# EAGLE board PCB_Iteration2.1FINAL (EAGLE 8.3.2)
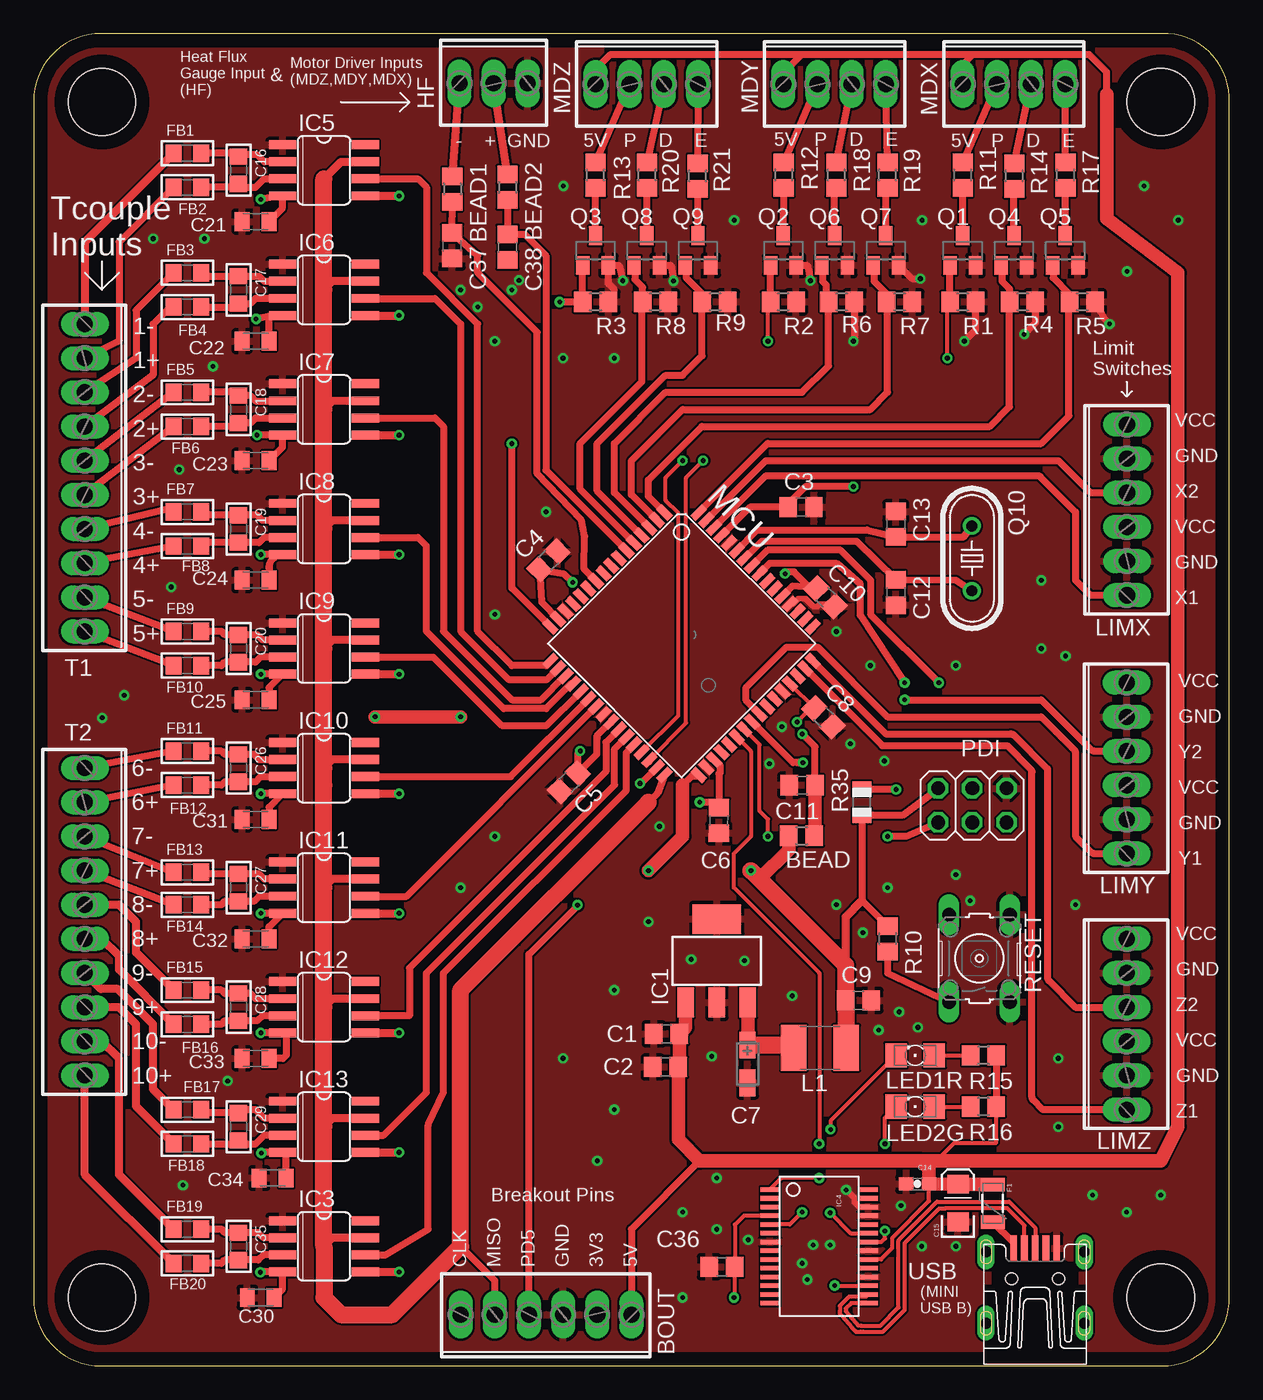
[diagram p0: board, top side]
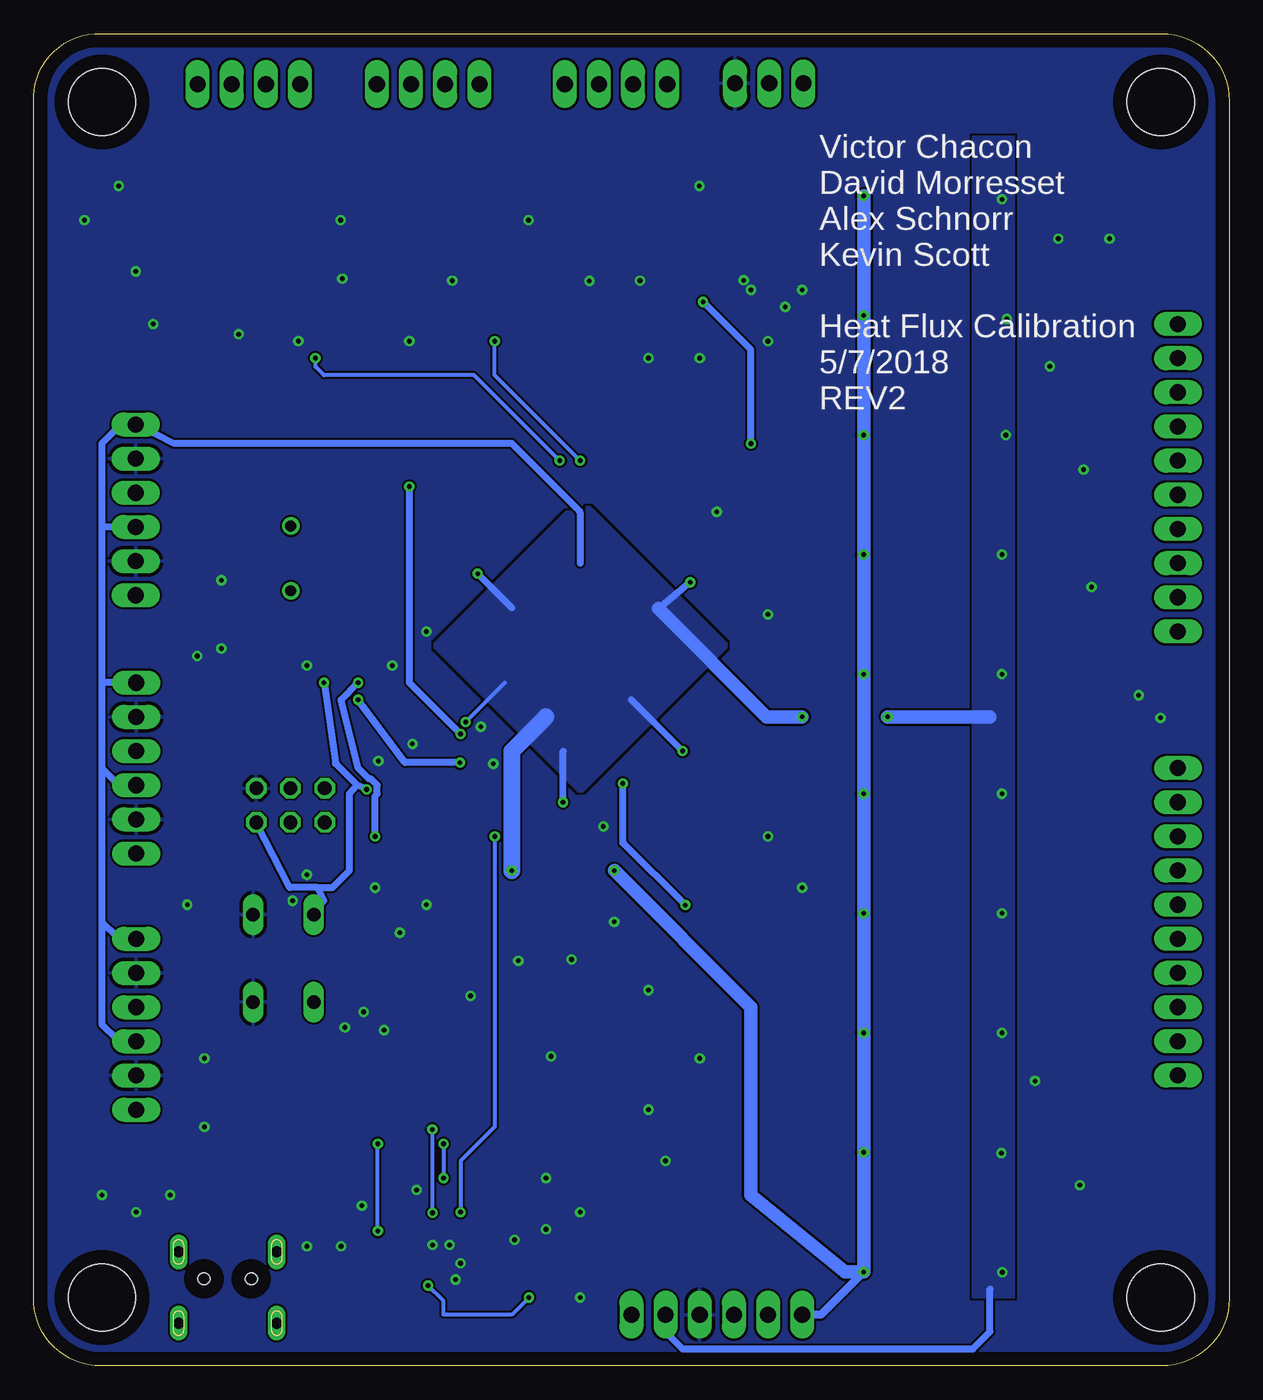
[diagram p1: board, bottom side, seen from below]

Size 88.9 x 99.06 mm. Coordinates in mm from the lower left corner, seen from the top.
Outline: 5,0 83.9,0 arc86 88.9,4.67 88.9,94.39 arc90 83.9,99.06 5,99.06 arc90 0,94.06 0,5 arc90 5,0
Copper layers (1*16): Top 0.035mm / dielectric 1.5mm / Bottom 0.035mm
Design rules "default": minimum track width 6mil, minimum drill 0.35mm, track to track 6mil, track to pad 6mil, pad to pad 6mil, via to via 6mil, smd to smd 6mil, copper to edge 40mil, drill to drill 6mil, minimum pad ring 10mil, minimum via ring 8mil, stop-mask expansion 4mil, vias tented up to drill 0mil, thermal gap 10mil
Net classes: 1 power: width 0.254 mm
Holes 5 mm at 5.08,93.98 5.08,5.08 83.82,5.08 83.82,93.98

## Footprints (pad centres in the part's own frame; a part is rotated, then mirrored left to right if it is on the bottom)
R0805 = smd 1.3 x 1.5: 1 -0.95,0; 2 0.95,0
6POL254 = drill 1.2 pad 1.778 long: 1 -6.35,0; 2 -3.81,0; 3 -1.27,0; 4 1.27,0; 5 3.81,0; 6 6.35,0
C0805 = smd 1.3 x 1.5: 1 -0.95,0; 2 0.95,0
CT3216 = smd 2 x 1.2: + -1.4,0; - 1.4,0
0603-CAP = smd 1.1 x 1: 1 -0.85,0; 2 0.85,0
EIA3216 = smd 1.4 x 1.6: A 1.4,0; C -1.4,0
_0805 = smd 1.2 x 1.3: 1 -1.016,0; 2 1.016,0
C0805K = smd 1.1 x 1.4: 1 -1,0; 2 1,0
PTC-1206 = smd 1 x 1.8: 1 -1.4,0; 2 1.4,0
3POL254 = drill 1.2 long: 1 -2.54,0; 2 0,0; 3 2.54,0
SOT223 = smd 1.219 x 2.235: 1 -2.311,-3.099; 2 0,-3.099; 3 2.311,-3.099 | smd 3.6 x 2.2: 4 0,3.099
SO08 = smd 0.66 x 2.032: 1 -1.905,-3.073; 2 -0.635,-3.073; 3 0.635,-3.073; 4 1.905,-3.073; 5 1.905,3.073; 6 0.635,3.073; 7 -0.635,3.073; 8 -1.905,3.073
SSOP28DB = smd 0.348 x 1.397: 1 -4.225,-3.656; 2 -3.575,-3.656; 3 -2.925,-3.656; 4 -2.275,-3.656; 5 -1.625,-3.656; 6 -0.975,-3.656; 7 -0.325,-3.656; 8 0.325,-3.656; 9 0.975,-3.656; 10 1.625,-3.656; 11 2.275,-3.656; 12 2.925,-3.656; 13 3.575,-3.656; 14 4.225,-3.656; 15 4.225,3.656; 16 3.575,3.656; 17 2.925,3.656; 18 2.275,3.656; 19 1.625,3.656; 20 0.975,3.656; 21 0.325,3.656; 22 -0.325,3.656; 23 -0.975,3.656; 24 -1.625,3.656; 25 -2.275,3.656; 26 -2.925,3.656; 27 -3.575,3.656; 28 -4.225,3.656
L1812 = smd 1.9 x 3.4: 1 -1.95,0; 2 1.95,0
LED_1206 = smd 1.6 x 1.803: A -1.422,0; C 1.422,0
TQFP-64A-64 = smd 1.194 x 0.559: 1 -7.8,6; 2 -7.8,5.2; 3 -7.8,4.4; 4 -7.8,3.6; 5 -7.8,2.8; 6 -7.8,2; 7 -7.8,1.2; 8 -7.8,0.4; 9 -7.8,-0.4; 10 -7.8,-1.2; 11 -7.8,-2; 12 -7.8,-2.8; 13 -7.8,-3.6; 14 -7.8,-4.4; 15 -7.8,-5.2; 16 -7.8,-6; 33 7.8,-6; 34 7.8,-5.2; 35 7.8,-4.4; 36 7.8,-3.6; 37 7.8,-2.8; 38 7.8,-2; 39 7.8,-1.2; 40 7.8,-0.4; 41 7.8,0.4; 42 7.8,1.2; 43 7.8,2; 44 7.8,2.8; 45 7.8,3.6; 46 7.8,4.4; 47 7.8,5.2; 48 7.8,6 | smd 0.559 x 1.194: 17 -6,-7.8; 18 -5.2,-7.8; 19 -4.4,-7.8; 20 -3.6,-7.8; 21 -2.8,-7.8; 22 -2,-7.8; 23 -1.2,-7.8; 24 -0.4,-7.8; 25 0.4,-7.8; 26 1.2,-7.8; 27 2,-7.8; 28 2.8,-7.8; 29 3.6,-7.8; 30 4.4,-7.8; 31 5.2,-7.8; 32 6,-7.8; 49 6,7.8; 50 5.2,7.8; 51 4.4,7.8; 52 3.6,7.8; 53 2.8,7.8; 54 2,7.8; 55 1.2,7.8; 56 0.4,7.8; 57 -0.4,7.8; 58 -1.2,7.8; 59 -2,7.8; 60 -2.8,7.8; 61 -3.6,7.8; 62 -4.4,7.8; 63 -5.2,7.8; 64 -6,7.8
4POL254 = drill 1.2 long: 1 -3.81,0; 2 -1.27,0; 3 1.27,0; 4 3.81,0
2X03 = drill 1.016 octagon: 1 -2.54,-1.27; 2 -2.54,1.27; 3 0,-1.27; 4 0,1.27; 5 2.54,-1.27; 6 2.54,1.27
SOT23 = smd 1 x 1.4: 1 -0.95,-1.1; 2 0.95,-1.1; 3 0,1.1
HC49/S = drill 0.813: 1 -2.413,0; 2 2.413,0
R0805' = smd 1.1 x 1.4: 1 -1,0; 2 1,0
B3F-10XX = drill 1.016 long: 1 -3.251,2.261; 2 3.251,2.261; 3 -3.251,-2.261; 4 3.251,-2.261
10POL254 = drill 1.2 long: 1 -11.43,0; 2 -8.89,0; 3 -6.35,0; 4 -3.81,0; 5 -1.27,0; 6 1.27,0; 7 3.81,0; 8 6.35,0; 9 8.89,0; 10 11.43,0
UX60-MB-5S8 = smd 2 x 0.5: 1 8.65,1.6; 2 8.65,0.8; 3 8.65,0; 4 8.65,-0.8; 5 8.65,-1.6 | drill 0.8 long: M1 3.1,-3.65; M2 3.1,3.65; M3 8.4,3.65; M4 8.4,-3.65 | hole 0.9: 6.4,-1.75; 6.4,1.75

## Placement (x,y rotation side)
BEAD  220 Ohm  [R0805]  57.1,39.42 0 top
BEAD1  220 Ohm  [R0805]  31.14,87.5 270 top
BEAD2  220 Ohm  [R0805]  35.24,87.63 270 top
BOUT  [6POL254]  38.1,3.81 180 top
C1  1uF  [C0805]  47.07,24.69 180 top
C2  10uF  [C0805]  46.99,22.23 180 top
C3  100nF  [C0805]  57.07,63.86 0 top
C4  100nF  [C0805]  38.28,59.89 45 top
C5  100nF  [C0805]  39.8,43.41 225 top
C6  100nF  [C0805]  50.95,40.56 269.8 top
C7  3.3uF  [CT3216]  53.09,22.45 270 top
C8  10nF  [C0805]  58.72,48.23 315 top
C9  10nF  [C0805]  61.34,27.18 0 top
C10  10nF  [C0805]  58.88,57.15 314.9 top
C11  10uF  [C0805]  57.15,43.18 180 top
C12  10pF  [C0805]  64.11,57.51 270 top
C13  10pF  [C0805]  64.11,62.59 90 top
C14  0.1uF  [0603-CAP]  65.74,13.54 180 top
C15  10uF  [EIA3216]  68.73,12.12 90 top
C16  0.01µF  [_0805]  15.24,88.9 270 top
C17  0.01µF  [_0805]  15.24,80.01 270 top
C18  0.01µF  [_0805]  15.24,71.12 270 top
C19  0.01µF  [_0805]  15.24,62.23 270 top
C20  0.01µF  [_0805]  15.24,53.34 270 top
C21  0.1 uF  [C0805K]  16.51,85.09 180 top
C22  0.1 uF  [C0805K]  16.51,76.2 180 top
C23  0.1 uF  [C0805K]  16.51,67.31 180 top
C24  0.1 uF  [C0805K]  16.51,58.42 180 top
C25  0.1 uF  [C0805K]  16.51,49.53 180 top
C26  0.01µF  [_0805]  15.24,44.45 270 top
C27  0.01µF  [_0805]  15.24,35.56 270 top
C28  0.01µF  [_0805]  15.24,26.67 270 top
C29  0.01µF  [_0805]  15.24,17.78 270 top
C30  0.1 uF  [C0805K]  16.89,5.08 180 top
C31  0.1 uF  [C0805K]  16.51,40.64 180 top
C32  0.1 uF  [C0805K]  16.51,31.75 180 top
C33  0.1 uF  [C0805K]  16.51,22.86 180 top
C34  0.1 uF  [C0805K]  17.78,13.97 180 top
C35  0.01µF  [_0805]  15.24,8.89 270 top
C36  0.1uF  [C0805]  51.18,7.37 180 top
C37  10nF  [C0805]  31.11,83.29 270 top
C38  10nF  [C0805]  35.24,83.19 270 top
F1  500mA  [PTC-1206]  71.32,12.09 90 top
FB1  Ferrite  [_0805]  11.43,90.17 0 top
FB2  Ferrite  [_0805]  11.43,87.63 0 top
FB3  Ferrite  [_0805]  11.43,81.28 0 top
FB4  Ferrite  [_0805]  11.43,78.74 0 top
FB5  Ferrite  [_0805]  11.43,72.39 0 top
FB6  Ferrite  [_0805]  11.43,69.85 0 top
FB7  Ferrite  [_0805]  11.43,63.5 0 top
FB8  Ferrite  [_0805]  11.43,60.96 0 top
FB9  Ferrite  [_0805]  11.43,54.61 0 top
FB10  Ferrite  [_0805]  11.43,52.07 0 top
FB11  Ferrite  [_0805]  11.43,45.72 0 top
FB12  Ferrite  [_0805]  11.43,43.18 0 top
FB13  Ferrite  [_0805]  11.43,36.7 0 top
FB14  Ferrite  [_0805]  11.43,34.29 0 top
FB15  Ferrite  [_0805]  11.43,27.94 0 top
FB16  Ferrite  [_0805]  11.43,25.4 0 top
FB17  Ferrite  [_0805]  11.43,19.05 0 top
FB18  Ferrite  [_0805]  11.43,16.51 0 top
FB19  Ferrite  [_0805]  11.43,10.16 0 top
FB20  Ferrite  [_0805]  11.43,7.62 0 top
HF  [3POL254]  34.2,95.36 0 top
IC1  [SOT223]  50.8,30.12 0 top
IC3  MAX31855  [SO08]  21.59,8.89 270 top
IC4  FT232R  [SSOP28DB]  58.42,8.89 270 top
IC5  MAX31855  [SO08]  21.59,88.9 270 top
IC6  MAX31855  [SO08]  21.59,80.01 270 top
IC7  MAX31855  [SO08]  21.59,71.12 270 top
IC8  MAX31855  [SO08]  21.59,62.23 270 top
IC9  MAX31855  [SO08]  21.59,53.34 270 top
IC10  MAX31855  [SO08]  21.59,44.45 270 top
IC11  MAX31855  [SO08]  21.59,35.56 270 top
IC12  MAX31855  [SO08]  21.59,26.67 270 top
IC13  MAX31855  [SO08]  21.59,17.78 270 top
L1  10uH  [L1812]  58.47,23.65 0 top
LED1R  [LED_1206]  65.56,23.09 180 top
LED2G  [LED_1206]  65.56,19.28 180 top
LIMX  [6POL254]  81.31,63.65 90 top
LIMY  [6POL254]  81.28,44.45 90 top
LIMZ  [6POL254]  81.28,25.4 90 top
MCU  ATXMEGA256A3-AU  [TQFP-64A-64]  48.18,53.7 315 top
MDX  [4POL254]  72.9,95.31 0 top
MDY  [4POL254]  59.56,95.31 0 top
MDZ  [4POL254]  45.59,95.31 0 top
PDI  [2X03]  69.8,41.68 0 top
Q1  BSS123  [SOT23]  69.09,82.93 0 top
Q2  BSS123  [SOT23]  55.75,82.93 0 top
Q3  BSS123  [SOT23]  41.78,82.93 0 top
Q4  BSS123  [SOT23]  72.9,82.93 0 top
Q5  BSS123  [SOT23]  76.71,82.93 0 top
Q6  BSS123  [SOT23]  59.56,82.93 0 top
Q7  BSS123  [SOT23]  63.37,82.93 0 top
Q8  BSS123  [SOT23]  45.59,82.93 0 top
Q9  BSS123  [SOT23]  49.4,82.93 0 top
Q10  12MHz  [HC49/S]  69.77,60.05 270 top
R1  10kOhm  [R0805]  69.09,79.12 0 top
R2  10kOhm  [R0805]  55.75,79.12 0 top
R3  10kOhm  [R0805]  41.78,79.12 0 top
R4  10kOhm  [R0805]  73.53,79.12 0 top
R5  10kOhm  [R0805]  77.98,79.12 0 top
R6  10kOhm  [R0805]  60.07,79.12 0 top
R7  10kOhm  [R0805]  64.39,79.12 0 top
R8  10kOhm  [R0805]  46.23,79.12 0 top
R9  10kOhm  [R0805]  50.67,79.12 0 top
R10  10kOhm  [R0805]  63.5,31.75 270 top
R11  220Ohm  [R0805]  69.09,88.54 90 top
R12  220Ohm  [R0805]  55.78,88.54 90 top
R13  220Ohm  [R0805]  41.78,88.54 90 top
R14  220Ohm  [R0805]  72.92,88.47 90 top
R15  1 kOhm  [R0805]  70.64,23.09 180 top
R16  1 kOhm  [R0805]  70.64,19.28 180 top
R17  220Ohm  [R0805]  76.73,88.54 90 top
R18  220Ohm  [R0805]  59.69,88.54 90 top
R19  220Ohm  [R0805]  63.5,88.54 90 top
R20  220Ohm  [R0805]  45.62,88.54 90 top
R21  220Ohm  [R0805]  49.38,88.47 90 top
R35  10K  [R0805']  61.59,41.91 90 top
RESET  [B3F-10XX]  70.33,30.3 90 top
T1  [10POL254]  3.81,66.04 270 top
T2  [10POL254]  3.81,33.02 270 top
USB  MINI-USB-UX60-MB-5S8  [UX60-MB-5S8]  74.47,0.08 90 top

## Library data of the parts
BEAD BEAD1 BEAD2 C1-C13 C36-C38 L1 R1-R21 = rcl
BOUT HF LIMX LIMY LIMZ MDX MDY MDZ T1 T2 = 2POL254_VICTOR; OC_FARNELL: unknown; OC_NEWARK: unknown
C14 = SparkFun-Capacitors; PROD_ID: CAP-00810
C15 = SparkFun-Capacitors; PROD_ID: CAP-00811
C16-C20 C26-C29 C35 FB1-FB20 = microbuilder
C21-C25 C30-C34 IC3 IC5-IC13 R35 = adafruit
F1 IC4 = SparkFun
IC1 = linear-technology; MPN: LT1129CST-5#PBF; OC_FARNELL: 1663375; OC_NEWARK: 57M2069
LED1R LED2G = eagle-ltspice; SPICEMODEL: NONE; SPICEPREFIX: D; SPICETYPE: diode
MCU = atmel-xmega
PDI = pinhead
Q1-Q9 = transistor-small-signal
Q10 = crystal; OC_FARNELL: 1667008; OC_NEWARK: unknown
RESET = switch-omron; MPN: B3F-1000; OC_FARNELL: 176432; OC_NEWARK: 36M3542
USB = con-hirose; OC_FARNELL: unknown; OC_NEWARK: unknown

## Nets
3V3: BEAD.1 BOUT.2 C4.1 C5.1 C6.1 C8.1 C9.1 C10.1 C21.1 C22.1 C23.1 C24.1 C25.1 C30.1 C31.1 C32.1 C33.1 C34.1 IC3.4 IC5.4 IC6.4 IC7.4 IC8.4 IC9.4 IC10.4 IC11.4 IC12.4 IC13.4 L1.2 MCU.15 MCU.25 MCU.35 MCU.45 MCU.53 PDI.2 R10.1 R35.1
5V: BOUT.1 C1.1 C2.1 C14.1 C15.A F1.2 IC1.1 IC4.20 MDX.1 MDY.1 MDZ.1 R15.1 R16.1
5V-PRE_F: F1.1 USB.1
AVCC: BEAD.2 C3.1 C11.1 MCU.61
CLK: BOUT.6 IC3.5 IC5.5 IC6.5 IC7.5 IC8.5 IC9.5 IC10.5 IC11.5 IC12.5 IC13.5 MCU.33
GND: BOUT.3 C1.2 C2.2 C3.2 C4.2 C5.2 C6.2 C7.- C8.2 C9.2 C10.2 C11.2 C12.2 C13.2 C14.2 C15.C C21.2 C22.2 C23.2 C24.2 C25.2 C30.2 C31.2 C32.2 C33.2 C34.2 C36.2 C37.2 HF.3 IC1.2 IC1.4 IC3.1 IC4.7 IC4.18 IC4.21 IC4.25 IC4.26 IC5.1 IC6.1 IC7.1 IC8.1 IC9.1 IC10.1 IC11.1 IC12.1 IC13.1 LIMX.2 LIMX.5 LIMY.2 LIMY.5 LIMZ.2 LIMZ.5 MCU.14 MCU.24 MCU.34 MCU.44 MCU.52 MCU.60 PDI.6 Q1.2 Q2.2 Q3.2 Q4.2 Q5.2 Q6.2 Q7.2 Q8.2 Q9.2 R1.2 R2.2 R3.2 R4.2 R5.2 R6.2 R7.2 R8.2 R9.2 RESET.3 RESET.4 USB.5
GND': C38.2
HEATG+: BEAD2.1 HF.2
HEATG-: BEAD1.1 HF.1
LIMX1: LIMX.1 MCU.62
LIMX2: LIMX.4 MCU.63
LIMY1: LIMY.1 MCU.41
LIMY2: LIMY.4 MCU.40
LIMZ1: LIMZ.1 MCU.47
LIMZ2: LIMZ.4 MCU.48
MDXD: MDX.3 R14.2
MDXE: MDX.4 R17.2
MDYD: MDY.3 R18.2
MDYE: MDY.4 R19.2
MDZD: MDZ.3 R20.2
MDZE: MDZ.4 R21.2
MISO: BOUT.5 IC3.7 IC5.7 IC6.7 IC7.7 IC8.7 IC9.7 IC10.7 IC11.7 IC12.7 IC13.7 MCU.32
N$1: Q5.3 R17.1
N$3: C17.1 FB3.2 IC6.2
N$4: C35.1 FB19.2 IC3.2
N$5: C16.1 FB1.2 IC5.2
N$6: MCU.56 PDI.1
N$7: C16.2 FB2.2 IC5.3
N$8: LED1R.A R15.2
N$9: C36.1 IC4.4 IC4.17
N$10: IC4.23 LED1R.C
N$11: LED2G.A R16.2
N$12: Q8.3 R20.1
N$13: IC4.22 LED2G.C
N$14: Q9.3 R21.1
N$15: Q6.3 R18.1
N$16: C35.2 FB20.2 IC3.3
N$17: Q2.3 R12.1
N$18: C17.2 FB4.2 IC6.3
N$19: Q7.3 R19.1
N$20: C18.1 FB5.2 IC7.2
N$21: Q1.3 R11.1
N$22: C18.2 FB6.2 IC7.3
N$23: Q4.3 R14.1
N$24: C19.1 FB7.2 IC8.2
N$26: C19.2 FB8.2 IC8.3
N$27: Q3.3 R13.1
N$28: C20.1 FB9.2 IC9.2
N$30: C20.2 FB10.2 IC9.3
N$31: C26.1 FB11.2 IC10.2
N$32: C26.2 FB12.2 IC10.3
N$33: C27.1 FB13.2 IC11.2
N$34: C27.2 FB14.2 IC11.3
N$35: C28.1 FB15.2 IC12.2
N$36: C28.2 FB16.2 IC12.3
N$37: C29.1 FB17.2 IC13.2
N$38: C29.2 FB18.2 IC13.3
PA2: MCU.64 Q5.1 R5.1
PA3: MCU.1 Q4.1 R4.1
PA4: MCU.2 Q7.1 R7.1
PA5: MCU.3 Q6.1 R6.1
PA6: MCU.4 Q9.1 R9.1
PA7: MCU.5 Q8.1 R8.1
PB0: BEAD2.2 C38.1 MCU.6
PB4: BEAD1.2 C37.1 MCU.10
PC0: MCU.16 Q3.1 R3.1
PC1: IC5.6 MCU.17
PC2: IC6.6 MCU.18
PC3: IC7.6 MCU.19
PC4: IC8.6 MCU.20
PC5: IC9.6 MCU.21
PC6: IC10.6 MCU.22
PC7: IC11.6 MCU.23
PD0: IC12.6 MCU.26
PD1: IC13.6 MCU.27
PD2: IC3.6 MCU.28
PD3: MCU.29 Q2.1 R2.1
PD4: MCU.30 Q1.1 R1.1
PD5: BOUT.4 MCU.31
PUL1: MDX.2 R11.2
PUL2: MDY.2 R12.2
PUL3: MDZ.2 R13.2
RESET: MCU.57 PDI.5 R35.2 RESET.2
RXD: IC4.5 MCU.39
SW_PULLUP: R10.2 RESET.1
T1+: FB2.1 T1.2
T1-: FB1.1 T1.1
T2+: FB4.1 T1.4
T2-: FB3.1 T1.3
T3+: FB6.1 T1.6
T3-: FB5.1 T1.5
T4+: FB8.1 T1.8
T4-: FB7.1 T1.7
T5+: FB10.1 T1.10
T5-: FB9.1 T1.9
T6+: FB12.1 T2.2
T6-: FB11.1 T2.1
T7+: FB14.1 T2.4
T7-: FB13.1 T2.3
T8+: FB16.1 T2.6
T8-: FB15.1 T2.5
T9+: FB18.1 T2.8
T9-: FB17.1 T2.7
T10+: FB20.1 T2.10
T10-: FB19.1 T2.9
TXD: IC4.1 MCU.38
USBDM: IC4.16 USB.2
USBDP: IC4.15 USB.3
V_REG_OUT: C7.+ IC1.3 L1.1
VCC: LIMX.3 LIMX.6 LIMY.3 LIMY.6 LIMZ.3 LIMZ.6
XT1: C12.1 MCU.58 Q10.2
XT2: C13.1 MCU.59 Q10.1

## Tracks (layer width: path | path; a pad name or v marks a point on that pad's centre or on a via)
3V3  (via drill 0.35)
  Top 0.305: 56.24,50.72 C8.1 57.8,48.91 v56.77,47.88
  Top 0.508: C21.1 18.52,86.1 IC5.4 v16.89,86.74 | C31.1 17.51,41.54 IC10.4 v16.89,42.55 | C23.1 18.52,68.32 IC7.4 v16.61,69.22 | C34.1 18.78,15.61 IC13.4 16.98,15.88 v16.94,15.83 | C24.1 17.51,59.32 arc-90 IC8.4 v16.89,60.33 | 56.24,50.72 MCU.45 | R35.1 64.6,40.94 PDI.2 | 62.21,40.89 R35.1 | C25.1 17.51,50.43 IC9.4 v16.89,51.44 | C33.1 18.54,22.86 18.8,23.11 18.8,24.49 IC12.4 v16.89,24.77 | v16.89,33.66 IC11.4 17.51,32.65 C32.1 | 42.95,47.83 MCU.25 41.91,46.86 41.91,46.66 41.88,46.63 41.88,45.49 C5.1 | 17.78,78.11 IC6.4 | 17.78,78.11 v16.54,77.85 | C22.1 17.51,77.83 17.78,78.11 | C30.1 18.52,5.71 IC3.4 16.89,6.99 v16.87,6.96 | 55.68,57.28 MCU.53 56.42,57.98 C10.1 57.59,57.98 56.54,59.03 55.88,59.03 v55.88,58.91 | v40.08,58.27 39.4,58.9 C4.1 37.77,56.79 MCU.15 | C5.1 40.47,44.62 | C5.1 40.47,45.55 v40.64,45.72 | MCU.35 51.05,44.61 51.05,44.11 50.96,44.02 C6.1 50.56,41.91 v49.53,41.91 | R35.1 61.59,34.6 R10.1
  Top 0.61: 60.39,29.78 60.39,33.4 61.59,34.6
  Top 1.016: v31.75,48.26 v25.4,48.26 | 60.42,27.15 C9.1 | 53.98,36.2 56.15,38.37 BEAD.1
  Top 1.27: L1.2 60.42,27.15 | C9.1 60.39,29.78 53.98,36.2 v53.34,36.83
  Bottom 0.305: v56.77,47.88 53.85,50.8
  Bottom 0.508: v40.08,58.27 42.44,56.31 | BOUT.2 41.91,2.54 40.64,1.27 19.05,1.27 17.78,2.54 17.78,5.71 | v40.64,45.72 44.45,49.53 | v49.53,41.91 49.53,45.72 | v55.88,58.91 53.34,56.37
  Bottom 1.016: 42.44,56.31 34.39,48.26 v31.75,48.26 | v25.4,48.26 17.78,48.26
  Bottom 1.27: v53.34,36.83 53.34,45.72 50.8,48.26
  pour Bottom: 16,91.44 16,5.08 19.05,5.08 19.05,91.44
  pour Bottom: 48.23,42.77 37.46,53.55 48.23,64.33 59.01,53.55
5V
  Top 0.254: R16.1 71.56,19.25
  Top 0.305: IC4.20 63.01,7.92 63.86,8.76 63.86,9.52 66.59,12.26 C14.1 | 71.59,18.54 71.59,18.67 | 71.59,18.67 R16.1 | 66.58,14.7 68.48,16.59 71.58,16.59 71.58,18.66 71.59,18.67
  Top 0.508: R15.1 R16.1 | 69.37,13.49 C15.A | 49.53,15.24 44.45,10.16 BOUT.1 | 79.79,94.55 79.79,96.2 78.47,97.52 69.85,97.52 | MDZ.1 41.91,95.44 41.91,96.52 42.91,97.52 57.15,97.52 | 57.15,97.52 69.85,97.52 | MDY.1 55.75,96.12 57.15,97.52 | MDX.1 69.09,96.76 69.85,97.52
  Top 0.813: C14.1
  Top 1.016: F1.2 69.37,13.49 | C15.A C14.1 | C14.1 66.58,14.7 66.04,15.24 | 66.04,15.24 49.53,15.24 47.94,16.83 C2.1 48.02,22.3 C1.1 48.49,25.16 IC1.1 | 66.04,15.24 83.82,15.24 85.09,17.78 85.09,81.28 79.79,85.31 79.79,94.55
5V-PRE_F
  Top 0.508: USB.1 72.87,9.14 F1.1
AVCC  (via drill 0.35)
  Top 0.508: C3.1 55.85,63.86 | 55.85,63.86 53.25,63.86 MCU.61 | C11.1 58.1,46.04 v57.16,46.98 v57.15,46.99 | v60.96,65.38 57.38,65.38 55.85,63.86
  Top 1.016: BEAD.2 58.1,39.47 C11.1
  Bottom 0.508: v57.16,46.98 60.96,50.78 v60.96,65.38
CLK  (via drill 0.35)
  Top 0.508: IC10.5 25.04,42.55 | MCU.33 49.53,43.86 48.94,43.86 48.26,43.18
  Top 0.61: IC5.5 v27.18,87 | IC6.5 v27.18,78.11 | IC7.5 v27.18,69.22 | IC8.5 v27.18,60.33 | IC9.5 v27.18,51.44 | IC10.5 v27.18,42.55 | IC11.5 v27.18,33.66 | IC12.5 v27.18,24.77 | IC13.5 v27.18,15.88 | IC3.5 v27.18,6.99
  Top 1.016: v45.72,36.83 48.26,39.37 48.26,43.18
  Bottom 0.61: v27.18,6.99 30.35,3.81 BOUT.6
  Bottom 1.016: v27.18,87 v27.18,78.11 v27.18,69.22 v27.18,60.33 v27.18,51.44 v27.18,42.55 v27.18,33.66 v27.18,24.77 v27.18,15.88 v27.18,6.99 28.57,6.99 35.56,12.7 35.56,26.67 v45.72,36.83
GND  (via drill 0.35)
  Top 0.406: C10.2 59.36,56.66 58.47,56.66 58.28,56.48 57.99,56.48 57.39,57.08 56.89,57.08 56.48,56.66 MCU.52 | v60.43,13.08 61.02,12.49 61.02,12.14 61.35,11.81 IC4.26
  Top 0.508: 43.18,80.01 42.73,80.46 Q3.2 43.53,81.83 v43.82,80.7 | Q8.2 47.38,81.83 v47.58,80.67 | Q2.2 57.54,81.83 v57.76,80.7 | R6.2 61.02,76.26 v60.96,76.2 | R1.2 70.04,77.02 v69.22,76.2 | R4.2 74.48,77.53 v73.66,76.71 | R5.2 79.56,77.92 v80.01,77.47 | Q7.2 65.31,80.85 v65.94,80.85
  other vias: 78.74,12.7 68.58,8.89 50.8,10.16 33.02,78.74 35.56,80.01 31.75,80.01 59.69,34.29 38.1,63.5 36.09,80.72 76.73,52.78 57.96,8.99 53.14,9.37 57.53,6.43 12.7,83.82 74.93,53.34 63.5,35.56 62.23,52.07 34.29,39.37 31.75,35.56 41.91,15.24 39.37,22.86 43.18,27.94 54.71,44.78 55.65,47.52 46.53,40.11 59.23,8.99 48.26,11.43 48.26,5.08 64.49,11.91 59.69,54.61 68.58,52.07 74.93,58.42 34.29,55.88 45.72,33.02 43.18,19.05 50.8,13.97 66.04,8.89 57.15,7.62 83.82,12.7 81.28,11.43 76.2,22.86 76.2,17.78 77.47,34.29 69.65,34.59 68.58,36.53 61.67,32.21 64.36,26.31 65.76,25.17 62.84,24.97 56.41,27.51 48.9,30.23 52.86,30.12 50.42,23.01 34.29,76.2 39.37,74.93 43.18,74.93 8.89,83.82 13.34,74.32 10.82,66.65 10.24,57.91 6.73,49.86 5.11,48.18 11.1,13.44 14.43,21.18 82.58,87.73 85.12,85.19 81.31,81.38 66.07,85.19 52.1,85.19 39.4,87.73 60.73,46.25 63.27,44.98
  pour Top: 96.52,101.6 -10.16,101.6 -10.16,-2.54 96.52,-2.54
  pour Bottom (rank 6): -10.16,101.6 -10.16,-2.54 96.52,-2.54 96.52,101.6
HEATG+
  Top 0.61: BEAD2.1 HF.2
HEATG-
  Top 0.61: BEAD1.1 HF.1
LIMX1
  Top 0.508: MCU.62 54.46,66.19 74.65,66.19 arc-45 74.87,66.1 77.47,63.5 77.47,58.42 78.59,57.3 LIMX.1
LIMX2
  Top 0.508: MCU.63 54.44,67.31 76.2,67.31 78.54,64.97 arc45 78.59,64.95 arc45 78.65,64.92 LIMX.4
LIMY1
  Top 0.508: LIMY.1 78.87,38.1 arc-45 78.65,38.19 77.47,39.37 77.47,45.59 arc45 77.38,45.81 74.93,48.26 63.5,48.26 58.31,53.45 55.99,53.45 52.98,50.44 52.98,49.48 53.98,48.48 MCU.41
LIMY2  (via drill 0.35)
  Top 0.508: v64.77,49.53 74.93,49.53 78.65,45.81 arc45 78.87,45.72 LIMY.4 | 56.74,44.86 57.15,44.86 | 57.15,44.86 v57.2,44.86 | MCU.40 56.46,44.86 57.15,44.86
  Bottom 0.508: v57.2,44.86 61.27,44.86 v64.77,49.53
LIMZ1
  Top 0.508: MCU.47 63.11,46.13 72.39,46.13 74.15,44.37 arc-45 74.24,44.14 74.24,20 arc45 74.34,19.77 75.06,19.05 LIMZ.1
LIMZ2
  Top 0.508: MCU.48 63.38,46.99 72.67,46.99 arc-45 72.89,46.9 75.39,44.4 75.39,28.88 arc45 75.48,28.66 77.47,26.67 LIMZ.4
MDXD
  Top 0.508: R14.2 MDX.3
MDXE
  Top 0.508: R17.2 MDX.4
MDYD
  Top 0.508: R18.2 MDY.3
MDYE
  Top 0.508: R19.2 MDY.4
MDZD
  Top 0.508: MDZ.3 R20.2
MDZE
  Top 0.508: MDZ.4 R21.2
MISO
  Top 0.508: 21.59,43.18 21.57,43.18 | MCU.32 46.38,42.57 45.72,41.91 | 31.75,8.89 34.29,6.35 BOUT.5
  Top 0.61: IC5.7 22.86,89.53 21.57,88.24 | IC6.7 22.2,80.64 21.57,80.01 | IC7.7 22.2,71.75 21.57,71.12 | IC8.7 22.2,62.87 21.57,62.23 | IC9.7 22.2,53.98 21.57,53.34 | IC10.7 22.2,45.09 21.57,44.45 | IC11.7 22.2,36.2 21.57,35.56 | IC12.7 22.2,27.3 21.57,26.67 | IC13.7 22.2,18.41 21.57,17.78 | IC3.7 22.2,9.53 21.57,8.89
  Top 1.27: 21.57,88.24 21.57,80.01 21.57,71.12 21.57,62.23 21.57,53.34 21.57,44.45 21.57,43.18 21.57,35.56 21.57,26.67 21.57,17.78 21.57,8.89 21.59,8.87 21.59,5.08 22.86,3.81 26.67,3.81 31.75,8.89 31.75,27.94 45.72,41.91
N$1
  Top 0.508: Q5.3 76.71,87.57 R17.1
N$3
  Top 0.508: IC6.2 17.14,80.64 16.76,81.03 C17.1 12.7,81.03 FB3.2
N$4
  Top 0.508: IC3.2 17.07,9.53 16.69,9.91 C35.1 14.22,9.91 13.97,10.16 FB19.2
N$5
  Top 0.508: FB1.2 14.99,90.17 C16.1 15.37,90.04 16.64,90.04 17.14,89.53 IC5.2
N$6  (via drill 0.35)
  Top 0.508: PDI.1 64.85,39.37 v63.5,39.37 | v64.77,50.8 61.47,55.83 61.47,58.14 59.69,59.69 54.74,59.69 MCU.56
  Bottom 0.508: v63.5,39.37 63.5,42.39 63.35,42.54 63.35,43.19 63.81,43.65 63.97,43.65 64.77,44.45 66.04,49.53 v64.77,50.8
N$7
  Top 0.508: FB2.2 14.99,87.63 C16.2 15.49,87.63 16.51,87.63 17.14,88.27 IC5.3
N$8
  Top 0.305: LED1R.A R15.2
N$9  (via drill 0.35)
  Top 0.305: IC4.4 52.82,11.16 52.15,10.49 52.15,7.38 C36.1 52.13,5.14 v52.07,5.08 | v59.56,5.97 IC4.17
  Bottom 0.305: v52.07,5.08 53.34,3.81 58.42,3.81 58.42,4.83 v59.56,5.97
N$10  (via drill 0.35)
  Top 0.305: LED1R.C 59.26,18.21 v59.26,17.58 | v59.23,11.38 60.75,9.87 IC4.23
  Bottom 0.305: v59.26,17.58 59.26,11.4 v59.23,11.38
N$11
  Top 0.305: LED2G.A R16.2
N$12
  Top 0.508: Q8.3 45.62,84.06 R20.1
N$13  (via drill 0.35)
  Top 0.254: IC4.22
  Top 0.305: LED2G.C arc90 64.03,19.38 | LED2G.C 63.91,19.05 | IC4.22 63.04,9.21 63.3,9.48 v63.3,10.03 | v63.3,16.51 63.3,18.44 LED2G.C
  Bottom 0.305: v63.3,16.51 63.32,16.48 63.3,16.47 v63.3,10.03
N$14
  Top 0.508: Q9.3 49.4,87.49 R21.1
N$15
  Top 0.508: Q6.3 59.56,87.47 R18.1
N$16
  Top 0.508: IC3.3 17.09,8.26 16.71,7.87 C35.2 14.22,7.87 13.97,7.62 FB20.2
N$17
  Top 0.508: Q2.3 R12.1
N$18
  Top 0.508: FB4.2 14.99,78.74 C17.2 16.13,78.99 16.51,79.38 IC6.3
N$19
  Top 0.508: Q7.3 63.37,87.47 R19.1
N$20
  Top 0.508: IC7.2 16.51,71.75 16.13,72.14 C18.1 14.99,72.39 FB5.2
N$21
  Top 0.508: Q1.3 R11.1
N$22
  Top 0.508: IC7.3 16.51,70.48 16.13,70.1 C18.2 14.99,69.85 FB6.2
N$23
  Top 0.508: Q4.3 72.9,87.49 R14.1
N$24
  Top 0.508: FB7.2 12.7,63.25 C19.1 16.64,63.25 17.02,62.87 IC8.2
N$26
  Top 0.508: C19.2 15.49,60.96 | C19.2 12.7,61.21 FB8.2 | IC8.3 17.14,61.59 16.76,61.21 C19.2
N$27
  Top 0.508: Q3.3 R13.1
N$28
  Top 0.508: IC9.2 17.02,53.98 16.64,54.36 C20.1 14.22,54.36 13.97,54.61 FB9.2
N$30
  Top 0.508: 14.99,52.07 C20.2 | C20.2 16.51,52.32 16.89,52.7 IC9.3 | C20.2 14.22,52.32 13.97,52.07 FB10.2
N$31
  Top 0.508: IC10.2 16.76,45.09 16.38,45.47 C26.1 14.22,45.47 13.97,45.72 FB11.2
N$32
  Top 0.508: IC10.3 16.89,43.81 16.51,43.43 C26.2 14.22,43.43 13.97,43.18 FB12.2
N$33
  Top 0.508: IC11.2 17.14,36.2 16.76,36.58 C27.1 12.57,36.58 FB13.2
N$34
  Top 0.508: IC11.3 16.76,34.92 16.38,34.54 C27.2 | C27.2 14.99,34.54 | C27.2 14.22,34.54 13.97,34.29 FB14.2
N$35
  Top 0.508: IC12.2 16.51,27.3 16.13,27.69 C28.1 14.22,27.69 13.97,27.94 FB15.2
N$36
  Top 0.508: IC12.3 17.02,26.04 16.64,25.65 C28.2 | C28.2 14.99,25.65 | C28.2 14.22,25.65 13.97,25.4 FB16.2
N$37
  Top 0.508: FB17.2 12.7,18.8 C29.1 15.49,19.05 16.51,19.05 17.14,18.41 IC13.2
N$38
  Top 0.508: IC13.3 17.14,17.14 16.51,16.51 15.49,16.51 | 15.49,16.51 C29.2 | FB18.2 15.49,16.51
PA2
  Top 0.508: Q5.1 75.82,81.77 75.82,80.9 77.03,79.69 R5.1 | 76.83,78.93 R5.1 | 76.86,78.95 R5.1 | MCU.64 54.58,68.58 74.93,68.58 76.99,70.64 76.99,79.08 R5.1
PA3
  Top 0.508: Q4.1 72.01,81.77 72.01,80.64 72.58,80.07 R4.1 72.57,79.11 72.57,71.32 71.09,69.85 49.69,69.85 45.72,65.88 45.72,64.64 MCU.1
PA4
  Top 0.508: Q7.1 62.48,81.77 62.48,80.64 63.44,79.69 R7.1 63.5,79.06 63.5,72.39 62.23,71.12 48.26,71.12 44.45,67.31 44.45,64.78 MCU.2
PA5
  Top 0.508: Q6.1 58.67,81.77 58.67,80.64 58.93,80.39 58.93,79.76 59.12,79.56 R6.1 59.05,79.06 | 59.03,79.03 59.05,79.06 | MCU.3 43.18,64.92 43.18,68.58 46.99,72.39 57.15,72.39 59.11,74.35 59.11,79 59.05,79.06
PA6
  Top 0.508: Q9.1 48.51,81.77 48.51,80.9 49.72,79.69 R9.1 49.71,79.11 49.71,75.11 48.26,73.66 46.99,73.66 41.91,68.58 41.91,65.06 MCU.4
PA7
  Top 0.508: Q8.1 44.7,81.77 44.7,80.77 45.28,80.2 R8.1 | 45.09,78.93 R8.1 | MCU.5 40.64,65.2 40.64,68.58 45.24,73.18 45.24,79.08 R8.1
PB0
  Top 0.508: 44.05,60.62 MCU.6 38.1,66.61 38.1,82.55 36.52,84.14 C38.1 BEAD2.2
PB4
  Top 0.508: BEAD1.2 C37.1 33.02,82.55 33.02,81.28 37.44,76.86 37.44,66.33 40.74,62.88 40.97,61.7 40.95,59.23 MCU.10
PC0  (via drill 0.35)
  Top 0.508: R3.1 Q3.1 | 38.4,54.97 MCU.16 35.56,57.83 v35.56,68.58 | 40.64,78.93 R3.1 | v39.12,79.12 R3.1
  Bottom 0.508: v35.56,68.58 35.56,75.56 v39.12,79.12
PC1
  Top 0.508: 38.4,52.42 MCU.17 38.07,52.07 35.56,52.07 33.02,54.61 33.02,77.47 29.21,81.28 29.21,87.63 28.57,88.27 IC5.6
PC2
  Top 0.508: IC6.6 29.84,79.38 31.75,77.47 31.75,54.61 35.31,51.05 38.19,51.05 MCU.18
PC3
  Top 0.508: IC7.6 29.84,70.48 30.48,69.85 30.48,54.61 35.56,49.53 37.72,49.53 39.48,51.29 MCU.19
PC4
  Top 0.508: IC8.6 28.57,61.59 29.21,60.96 29.21,54.61 34.95,48.87 38.1,48.87 39.96,50.73 MCU.20
PC5
  Top 0.508: IC9.6 29.72,52.7 34.8,47.62 38.15,47.62 MCU.21
PC6
  Top 0.508: IC10.6 35.48,43.81 MCU.22
PC7
  Top 0.508: MCU.23 27.72,34.92 IC11.6
PD0
  Top 0.508: MCU.26 42.55,46.36 42.55,44.2 27.94,29.59 27.94,26.04 IC12.6
PD1
  Top 0.508: MCU.27 43.2,45.89 43.2,43.2 29.21,29.21 29.21,20.32 26.04,17.14 IC13.6
PD2
  Top 0.508: IC3.6 26.16,8.26 29.34,10.16 29.34,17.91 30.48,20.32 30.48,29.21 44.07,42.8 44.07,45.59 44.65,46.17 MCU.28
PD3  (via drill 0.35)
  Top 0.305: MCU.29 47.94,48.36 47.94,63.4 46.99,64.34 46.99,66.04 v48.26,67.31 | v54.61,76.2 54.61,78.93
  Top 0.508: Q2.1 R2.1 54.61,78.93 | MCU.29
  Bottom 0.305: v48.26,67.31 54.61,73.66 v54.61,76.2
PD4  (via drill 0.35)
  Top 0.305: 67.94,78.93 67.94,77.47 v67.94,74.93 | MCU.30 48.51,47.8 48.51,66.04 v49.78,67.31
  Top 0.508: Q1.1 R1.1 67.94,78.93 | MCU.30 45.78,44.94
  Bottom 0.305: v49.78,67.31 56.13,73.66 67.31,73.66 67.94,74.3 v67.94,74.93
PD5  (via drill 0.35)
  Top 0.508: MCU.31 45.15,43.31 v45.09,43.31 | BOUT.4 36.83,30.61 40.44,34.21 v40.44,34.27
  Bottom 0.508: v45.09,43.31 45.09,38.86 45.03,38.86 v40.44,34.27
PUL1
  Top 0.508: R11.2 MDX.2
PUL2
  Top 0.508: R12.2 MDY.2
PUL3
  Top 0.508: R13.2 MDZ.2
RESET  (via drill 0.35)
  Top 0.508: MCU.57 54.58,60.66 59.99,60.66 62.23,58.42 62.23,55.88 v67.31,50.8 | R35.2 64.09,42.91 v64.14,42.86
  Bottom 0.508: 67.82,35.56 67.33,34.59 RESET.2 | 67.82,35.56 69.85,35.56 PDI.5 | 64.86,43.19 65.41,42.55 65.41,36.83 66.67,35.56 67.82,35.56 | 64.86,43.19 66.45,44.78 v67.31,50.8 | v64.14,42.86 64.86,43.19
RXD  (via drill 0.35)
  Top 0.305: IC4.5 56.23,10.52 v57.15,11.43 | v54.61,39.37 54.61,40.64 53.98,41.27 53.98,46.2 MCU.39
  Bottom 0.305: v54.61,39.37 54.61,17.78 57.15,15.24 v57.15,11.43
SW_PULLUP
  Top 0.508: R10.2 63.5,29.21 RESET.1
T1+
  Top 0.508: FB2.1 6.35,83.57 6.35,76.2 T1.2
T1-
  Top 0.61: FB1.1 3.81,83.57 T1.1
T2+
  Top 0.508: 10.16,78.49 FB4.1 10.16,78.74 8.89,77.47 8.89,73.66 T1.4
T2-
  Top 0.508: FB3.1 7.62,78.49 7.62,74.93 T1.3
T3+
  Top 0.508: FB6.1 T1.6
T3-
  Top 0.508: FB5.1 T1.5
T4+
  Top 0.508: FB8.1 T1.8
T4-
  Top 0.508: FB7.1 10.16,63.75 T1.7
T5+
  Top 0.508: FB10.1 T1.10
T5-
  Top 0.508: FB9.1 T1.9
T6+
  Top 0.508: FB12.1 T2.2
T6-
  Top 0.508: FB11.1 T2.1
T7+
  Top 0.508: FB14.1 T2.4
T7-
  Top 0.508: FB13.1 T2.3
T8+
  Top 0.61: FB16.1 6.35,29.46 6.35,30.48 5.08,31.75 T2.6
T8-
  Top 0.61: FB15.1 7.62,30.73 7.62,33.02 6.35,34.29 T2.5
T9+
  Top 0.61: FB18.1 7.62,19.3 7.62,25.4 6.35,26.67 T2.8
T9-
  Top 0.61: FB17.1 8.89,20.57 8.89,25.4 6.26,28.03 4.99,28.03 T2.7
T10+
  Top 0.61: FB20.1 3.81,14.22 T2.10
T10-
  Top 0.61: FB19.1 6.35,14.22 6.35,22.86 5.08,24.13 T2.9
TXD  (via drill 0.35)
  Top 0.305: MCU.38 53.34,45.71 53.34,39.37 52.07,38.1 52.07,35.56 58.42,29.21 v58.42,16.51 | v58.42,13.97 55.62,13.97 IC4.1
  Bottom 0.305: v58.42,16.51 v58.42,13.97
USBDM
  Top 0.305: IC4.16 61.91,5.14 60.63,5.14 59.94,4.46 59.94,4.08 59.93,3.9 59.94,3.89 59.94,3.88 60.07,3.75 60.88,2.83 60.88,2.81 61.01,2.68 61.12,2.55 61.14,2.55 61.15,2.54 61.33,2.53 61.5,2.53 61.51,2.54 61.69,2.53 61.7,2.54 63.16,2.54 64.77,4.15 64.77,9.14 67.33,11.71 67.8,11.71 67.81,11.72 72.39,11.72 73.67,10.44 USB.2
USBDP
  Top 0.305: 61.34,3 60.4,4.06 60.4,4.27 60.8,4.67 IC4.15 | 61.34,3 | 61.34,3 61.35,3.01 61.53,3 62.97,3 64.31,4.34 64.31,9.33 67.18,12.2 72.55,12.2 74.47,10.28 USB.3
V_REG_OUT
  Top 1.016: C7.+ 53.11,23.98 IC1.3
  Top 1.27: C7.+ 56.31,23.85 L1.1
VCC
  Bottom 0.508: 48.26,59.69 48.26,63.37 arc-45 48.35,63.59 53.34,68.58 78.48,68.58 81.08,69.91 arc-45 LIMX.6 82.27,70 arc-45 82.49,69.91 83.82,68.58 83.82,62.46 | 83.82,62.46 83.82,50.8 | 83.82,50.8 83.82,44.45 | 83.82,44.45 82.64,43.27 arc-45 82.42,43.18 LIMY.3 | LIMY.6 83.82,50.8 | LIMX.3 83.64,62.38 arc45 83.82,62.46 | 83.82,44.45 83.82,33.02 | 83.82,33.02 83.82,25.4 82.64,24.22 arc-45 82.42,24.13 LIMZ.3 | LIMZ.6 82.42,31.75 arc45 82.64,31.84 83.82,33.02
XT1
  Top 0.508: MCU.58 52.9,60.06 54.15,61.32 61.19,61.32 C12.1 68.58,58.42 Q10.2
XT2
  Top 0.508: 52.32,60.62 MCU.59 53.8,62.15 61.98,62.15 C13.1 69.16,61.65 Q10.1

## Text on the board
tPlace: & | Motor Driver Inputs / (MDZ,MDY,MDX) | Heat Flux / Gauge Input / (HF) | - + GND | 5V P D E | 5V P D E | 5V P D E | Tcouple / Inputs | Limit / Switches | VCC / GND / X2 / VCC / GND / X1 | 1- / 1+ / 2- / 2+ / 3- / 3+ / 4- / 4+ / 5- / 5+ | VCC / GND / Y2 / VCC / GND / Y1 | 6- / 6+ / 7- / 7+ / 8- / 8+ / 9- / 9+ / 10- / 10+ | VCC / GND / Z2 / VCC / GND / Z1 | Breakout Pins | CLK | MISO | PD5 | GND | 3V3 | 5V | (MINI / USB B)
bPlace: Victor Chacon / David Morresset / Alex Schnorr / Kevin Scott / / Heat Flux Calibration / 5/7/2018 / REV2